# EAGLE board smartwatch (2)7 (EAGLE 6.5.0)

Size 100 x 80 mm. Coordinates in mm from the lower left corner, seen from the top.
Outline: 0,0 100,0 100,80 0,80 0,0
Copper layers (1*16): Top 0.035mm / dielectric 1.5mm / Bottom 0.035mm
Design rules "default": minimum track width 10mil, minimum drill 24mil, track to track 8mil, track to pad 8mil, pad to pad 8mil, via to via 8mil, smd to smd 8mil, copper to edge 40mil, drill to drill 8mil, minimum pad ring 10mil, minimum via ring 8mil, stop-mask expansion 4mil, vias tented up to drill 0mil, thermal gap 10mil

## Footprints (pad centres in the part's own frame; a part is rotated, then mirrored left to right if it is on the bottom)
C0805 = smd 1.3 x 1.5: 1 -0.95,0; 2 0.95,0
SOD-123 = smd 1.4 x 1.4: A 1.85,0; C -1.85,0
SOD-123_MINI-SMA = smd 1.5 x 2.1: A 1.8,0; C -1.8,0
1X02 = drill 1.016 long: 1 -1.27,0; 2 1.27,0
USB-B-MICRO-SMD_V03 = smd 1.4 x 0.4: D+1 2.7,0; D-1 2.7,0.65; GND1 2.7,-1.3; ID1 2.7,-0.65; VBUS1 2.7,1.3 | hole 0.85: 2.2,1.9; 2.2,-1.9
1X05-1.27MM = drill 0.508 pad 1: 1 0,0; 2 1.27,0; 3 2.54,0; 4 3.81,0; 5 5.08,0
SOT23-R = smd 0.635 x 1.016: 1 -0.95,-1; 2 0.95,-1; 3 0,1
SOT23 = smd 1 x 1.4: 1 -0.95,-1.1; 2 0.95,-1.1; 3 0,1.1
R2012 = smd 1.3 x 1.5: 1 -0.85,0; 2 0.85,0
HM-11 = smd 2.4 x 0.9: GND 6.5,0; NC@5 -7,0; NC@6 -7,-1.5; NC@7 -7,-3; NC@8 -7,-4.5; NC@10 6.5,-3; PIO0 6.5,6; PIO1 6.5,4.5; PIO2 6.5,3; PIO3 6.5,1.5; RESETB 6.5,-1.5; UART_CTS -7,3; UART_RTS -7,6; UART_RX -7,1.5; UART_TX -7,4.5; VCC 6.5,-4.5
UG-2864HSWEG01_0.96IN_WRAPAROUND = smd 0.35 x 2.2 bottom: 1 -10.15,-1.2; 2 -9.45,-1.2; 3 -8.75,-1.2; 4 -8.05,-1.2; 5 -7.35,-1.2; 6 -6.65,-1.2; 7 -5.95,-1.2; 8 -5.25,-1.2; 9 -4.55,-1.2; 10 -3.85,-1.2; 11 -3.15,-1.2; 12 -2.45,-1.2; 13 -1.75,-1.2; 14 -1.05,-1.2; 15 -0.35,-1.2; 16 0.35,-1.2; 17 1.05,-1.2; 18 1.75,-1.2; 19 2.45,-1.2; 20 3.15,-1.2; 21 3.85,-1.2; 22 4.55,-1.2; 23 5.25,-1.2; 24 5.95,-1.2; 25 6.65,-1.2; 26 7.35,-1.2; 27 8.05,-1.2; 28 8.75,-1.2; 29 9.45,-1.2; 30 10.15,-1.2 | hole 0.4: -8,-5.45; 8,-5.45
SOT95P237X112-3N = smd 0.991 x 1.321: 1 -0.94,-1.016; 2 0.94,-1.016; 3 0,1.016
SOT23-5 = smd 0.55 x 1.2: 1 -0.95,-1.3; 2 0,-1.3; 3 0.95,-1.3; 4 0.95,1.3; 5 -0.95,1.3
KSSG33J12 = smd 1 x 1: GND 2,-2.5; NC -3,1.5; VCC -3,-2.5
TQFP32-08 = smd 1.27 x 0.559: 1 -4.293,2.8; 2 -4.293,2; 3 -4.293,1.2; 4 -4.293,0.4; 5 -4.293,-0.4; 6 -4.293,-1.2; 7 -4.293,-2; 8 -4.293,-2.8; 17 4.293,-2.8; 18 4.293,-2; 19 4.293,-1.2; 20 4.293,-0.4; 21 4.293,0.4; 22 4.293,1.2; 23 4.293,2; 24 4.293,2.8 | smd 0.559 x 1.27: 9 -2.8,-4.293; 10 -2,-4.293; 11 -1.2,-4.293; 12 -0.4,-4.293; 13 0.4,-4.293; 14 1.2,-4.293; 15 2,-4.293; 16 2.8,-4.293; 25 2.8,4.293; 26 2,4.293; 27 1.2,4.293; 28 0.4,4.293; 29 -0.4,4.293; 30 -1.2,4.293; 31 -2,4.293; 32 -2.8,4.293
8-TDFN-EP = smd 0.7 x 0.3: 1 -0.99,0.75; 2 -0.99,0.25; 3 -0.99,-0.25; 4 -0.99,-0.75; 5 0.99,-0.75; 6 0.99,-0.25; 7 0.99,0.25; 8 0.99,0.75 | smd 0.8 x 1.38: 9 0,0
FC-135 = smd 1 x 1.8: 1 -1.25,0; 2 1.25,0

## Placement (x,y rotation side)
C1  1uF  [C0805]  -59.69,-128.27 0 top  (outside the outline)
C2  100nF  [C0805]  -71.12,-140.97 0 top  (outside the outline)
C3  4.7uF  [C0805]  -40.64,46.99 0 top  (outside the outline)
C4  4.7uF  [C0805]  -46.99,46.99 0 top  (outside the outline)
C5  1uF  [C0805]  -71.12,-163.83 0 top  (outside the outline)
C6  10uF  [C0805]  -71.12,-170.18 0 top  (outside the outline)
C7  100nF  [C0805]  -71.12,-147.32 0 top  (outside the outline)
C8  1uF/10V  [C0805]  -59.69,-44.45 0 top  (outside the outline)
C9  1uF/10V  [C0805]  -59.69,-50.8 0 top  (outside the outline)
C10  1uF  [C0805]  -59.69,-57.15 0 top  (outside the outline)
C11  1uF  [C0805]  -59.69,-63.5 0 top  (outside the outline)
C12  2.2uF  [C0805]  -59.69,-82.55 0 top  (outside the outline)
C13  2.2uF  [C0805]  -59.69,-88.9 0 top  (outside the outline)
C14  10nF  [C0805]  -74.93,-195.58 0 top  (outside the outline)
C15  100nF  [C0805]  -71.12,-153.67 0 top  (outside the outline)
C16  10uF  [C0805]  -74.93,-208.28 0 top  (outside the outline)
D1  B130LAW  [SOD-123]  -59.69,-97.79 0 top  (outside the outline)
D2  [SOD-123_MINI-SMA]  -73.66,-246.38 0 top  (outside the outline)
JP1  [1X02]  -20.32,57.15 0 top  (outside the outline)
JP2  MICRO USB  [USB-B-MICRO-SMD_V03]  -34.29,29.21 0 top  (outside the outline)
JP3  [1X05-1.27MM]  -72.39,-158.75 0 top  (outside the outline)
Q1  DMP1045U  [SOT23-R]  -60.96,-93.98 0 top  (outside the outline)
Q2  [SOT23]  -74.93,-234.95 0 top  (outside the outline)
R1  10K  [R2012]  -30.48,55.88 0 top  (outside the outline)
R2  150  [R2012]  -74.93,-182.88 0 top  (outside the outline)
R3  4.7K  [R2012]  -74.93,-189.23 0 top  (outside the outline)
R4  100K  [R2012]  -59.69,-110.49 0 top  (outside the outline)
R5  390K  [R2012]  -59.69,-76.2 0 top  (outside the outline)
R6  4.7K  [R2012]  -74.93,-220.98 0 top  (outside the outline)
R7  150  [R2012]  -74.93,-214.63 0 top  (outside the outline)
R8  4.7K  [R2012]  -74.93,-227.33 0 top  (outside the outline)
R9  1K  [R2012]  -74.93,-240.03 0 top  (outside the outline)
U2  HM-11  [HM-11]  -21.59,30.48 0 top  (outside the outline)
U3  [UG-2864HSWEG01_0.96IN_WRAPAROUND]  -26.67,7.62 0 top  (outside the outline)
U4  MCP1700T-3302E/TT  [SOT95P237X112-3N]  -55.88,-119.38 0 top  (outside the outline)
U5  MCP73832  [SOT23-5]  -26.67,57.15 0 top  (outside the outline)
U$1  KSSG33J12  [KSSG33J12]  -58.42,-134.62 0 top  (outside the outline)
U$2  [TQFP32-08]  -68.58,-130.81 0 top  (outside the outline)
U$3  MAX17043  [8-TDFN-EP]  -76.2,-176.53 0 top  (outside the outline)
X1  FC-135  [FC-135]  -69.85,-176.53 0 top  (outside the outline)

## Library data of the parts
C1-C16 = rcl
D1 = lbrzak
D2 = diode
JP1 = pinhead
JP2 = SparkFun-Connectors; PROD_ID: CONN-11752
JP3 = SparkFun-Connectors
Q1 = lbrmicrobuilder
Q2 = semicon-smd-ipc
R1-R9 = resistor
U2 = hm-11
U3 = microbuilder
U4 = mcp1700T-330; MPN: MCP1700T-3302E/TT; OC_FARNELL: 1296592; OC_NEWARK: 88H9817; PACKAGE: SOT23-3; SUPPLIER: Microchip
U5 = SparkFun
U$1 = kssg33j12
U$2 = samd20
U$3 = max17043
X1 = m-pad-2.1

## Nets
ALRT: R3.2 U$3.5
BUZ: R9.1 U$2.16
CS: U3.13 U$2.14
CTS: U2.UART_RTS U$2.20
GND: C1.2 C2.2 C3.2 C4.2 C5.2 C6.2 C7.2 C10.1 C11.1 C12.1 C13.1 C14.1 C15.1 C16.1 D2.A JP1.2 JP2.GND1 JP3.2 R1.2 R4.2 R5.1 U2.GND U3.1 U3.8 U3.11 U3.12 U3.29 U3.30 U4.1 U5.2 U$1.GND U$2.10 U$2.28 U$3.1 U$3.4 U$3.6 U$3.9
MOSI: U3.19 U$2.11
N$1: C8.2 U3.2
N$2: C8.1 U3.3
N$3: C9.2 U3.4
N$4: C9.1 U3.5
N$5: R5.2 U3.26
N$6: C2.1 U$2.29
N$7: C12.2 U3.27
N$8: C13.2 U3.28
N$9: JP3.5 U$2.32
N$10: JP3.4 U$2.31
N$11: JP3.1 U$2.26
N$12: U$2.1 X1.1
N$13: U$2.2 X1.2
N$14: D2.C Q2.2 U$1.VCC
N$15: Q2.1 R9.2
N$17: C14.2 R2.2 U$3.3
N$20: C16.2 R7.2 U$3.2
PIO2: U2.PIO2 U$2.22
PIO3: U2.PIO3 U$2.23
RES: U3.14 U$2.12
RESETB: U2.RESETB U$2.21
RTS: U2.UART_CTS U$2.19
RX: U2.UART_TX U$2.17
SCK: U3.18 U$2.13
SCL: R8.2 U$2.6 U$3.7
SDA: R6.2 U$2.5 U$3.8
STAT: U5.1
TX: U2.UART_RX U$2.18
VBAT: C4.1 JP1.1 Q1.3 R1.1 R2.1 R7.1 U5.3
VCC: C1.1 C6.1 C7.1 C10.2 C11.2 C15.2 JP3.3 Q2.3 R3.1 R6.1 R8.1 U2.VCC U3.6 U3.9 U3.10 U4.2 U$2.9 U$2.30
VIN: C5.1 D1.C Q1.2 U4.3
VUSB: C3.1 D1.A JP2.VBUS1 Q1.1 R4.1 U5.4

## Tracks (layer width: path | path; a pad name or v marks a point on that pad's centre or on a via)
ALRT  (1 unrouted)
BUZ  (1 unrouted)
CS  (1 unrouted)
CTS  (1 unrouted)
GND  (36 unrouted)
MOSI  (1 unrouted)
N$1  (1 unrouted)
N$2  (1 unrouted)
N$3  (1 unrouted)
N$4  (1 unrouted)
N$5  (1 unrouted)
N$6  (1 unrouted)
N$7  (1 unrouted)
N$8  (1 unrouted)
N$9  (1 unrouted)
N$10  (1 unrouted)
N$11  (1 unrouted)
N$12  (1 unrouted)
N$13  (1 unrouted)
N$14  (2 unrouted)
N$15  (1 unrouted)
N$17  (2 unrouted)
N$20  (2 unrouted)
PIO2  (1 unrouted)
PIO3  (1 unrouted)
RES  (1 unrouted)
RESETB  (1 unrouted)
RTS  (1 unrouted)
RX  (1 unrouted)
SCK  (1 unrouted)
SCL  (2 unrouted)
SDA  (2 unrouted)
TX  (1 unrouted)
VBAT  (6 unrouted)
VCC  (17 unrouted)
VIN  (3 unrouted)
VUSB  (5 unrouted)